# Altium PCB PCB.PcbDoc
Units mm, origin at the board's own origin, x right, y up, seen from the top; angles counter-clockwise.
Board outline 63.5 x 55.5 mm, 4 copper layers (L1(Signal), L2(Power), L3(GND), L4(Signal)), stack 0.603 mm thick; 45 components, 39 nets, 166 pads, 72 vias.
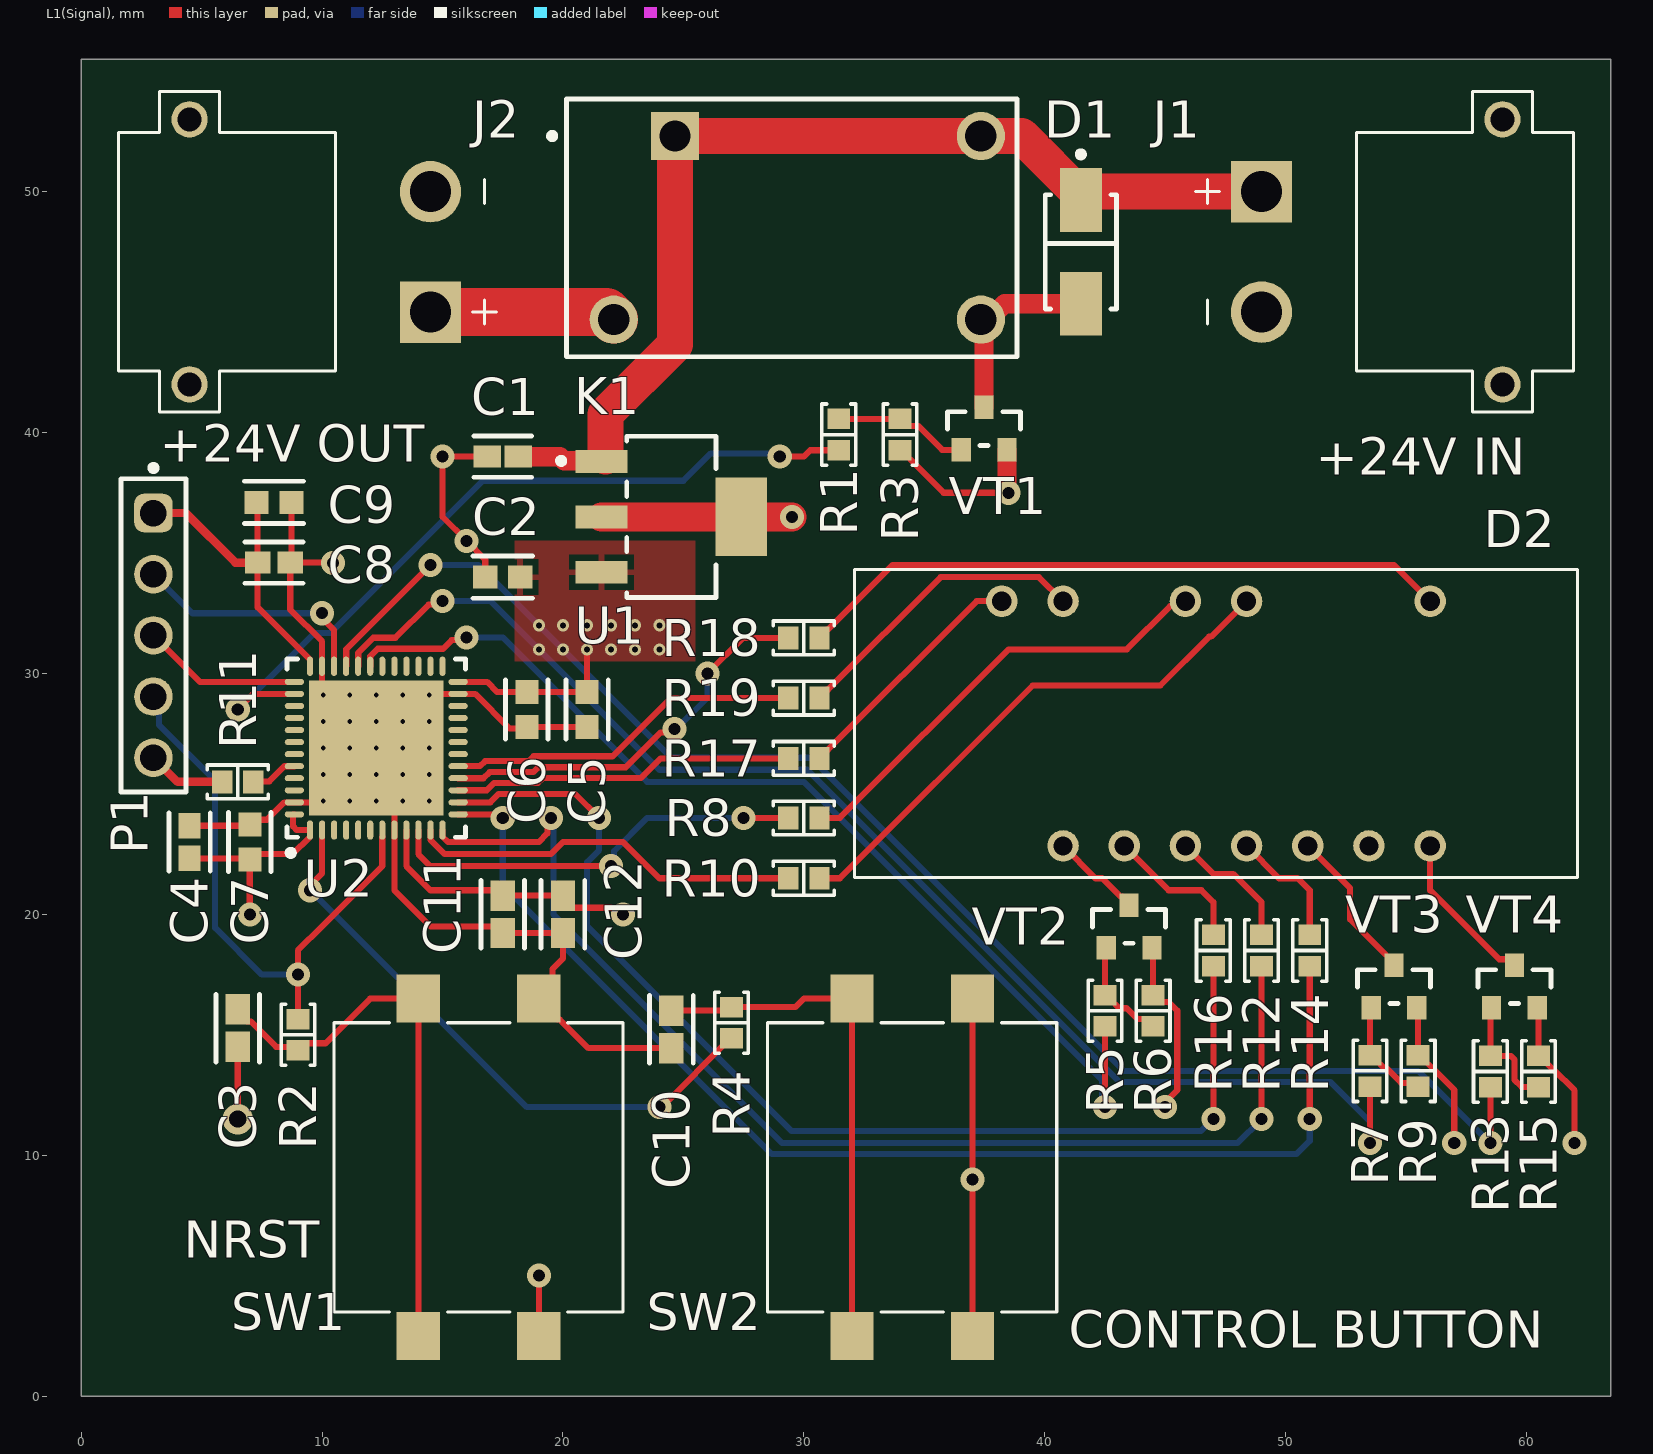
[diagram p0: L1(Signal) view]
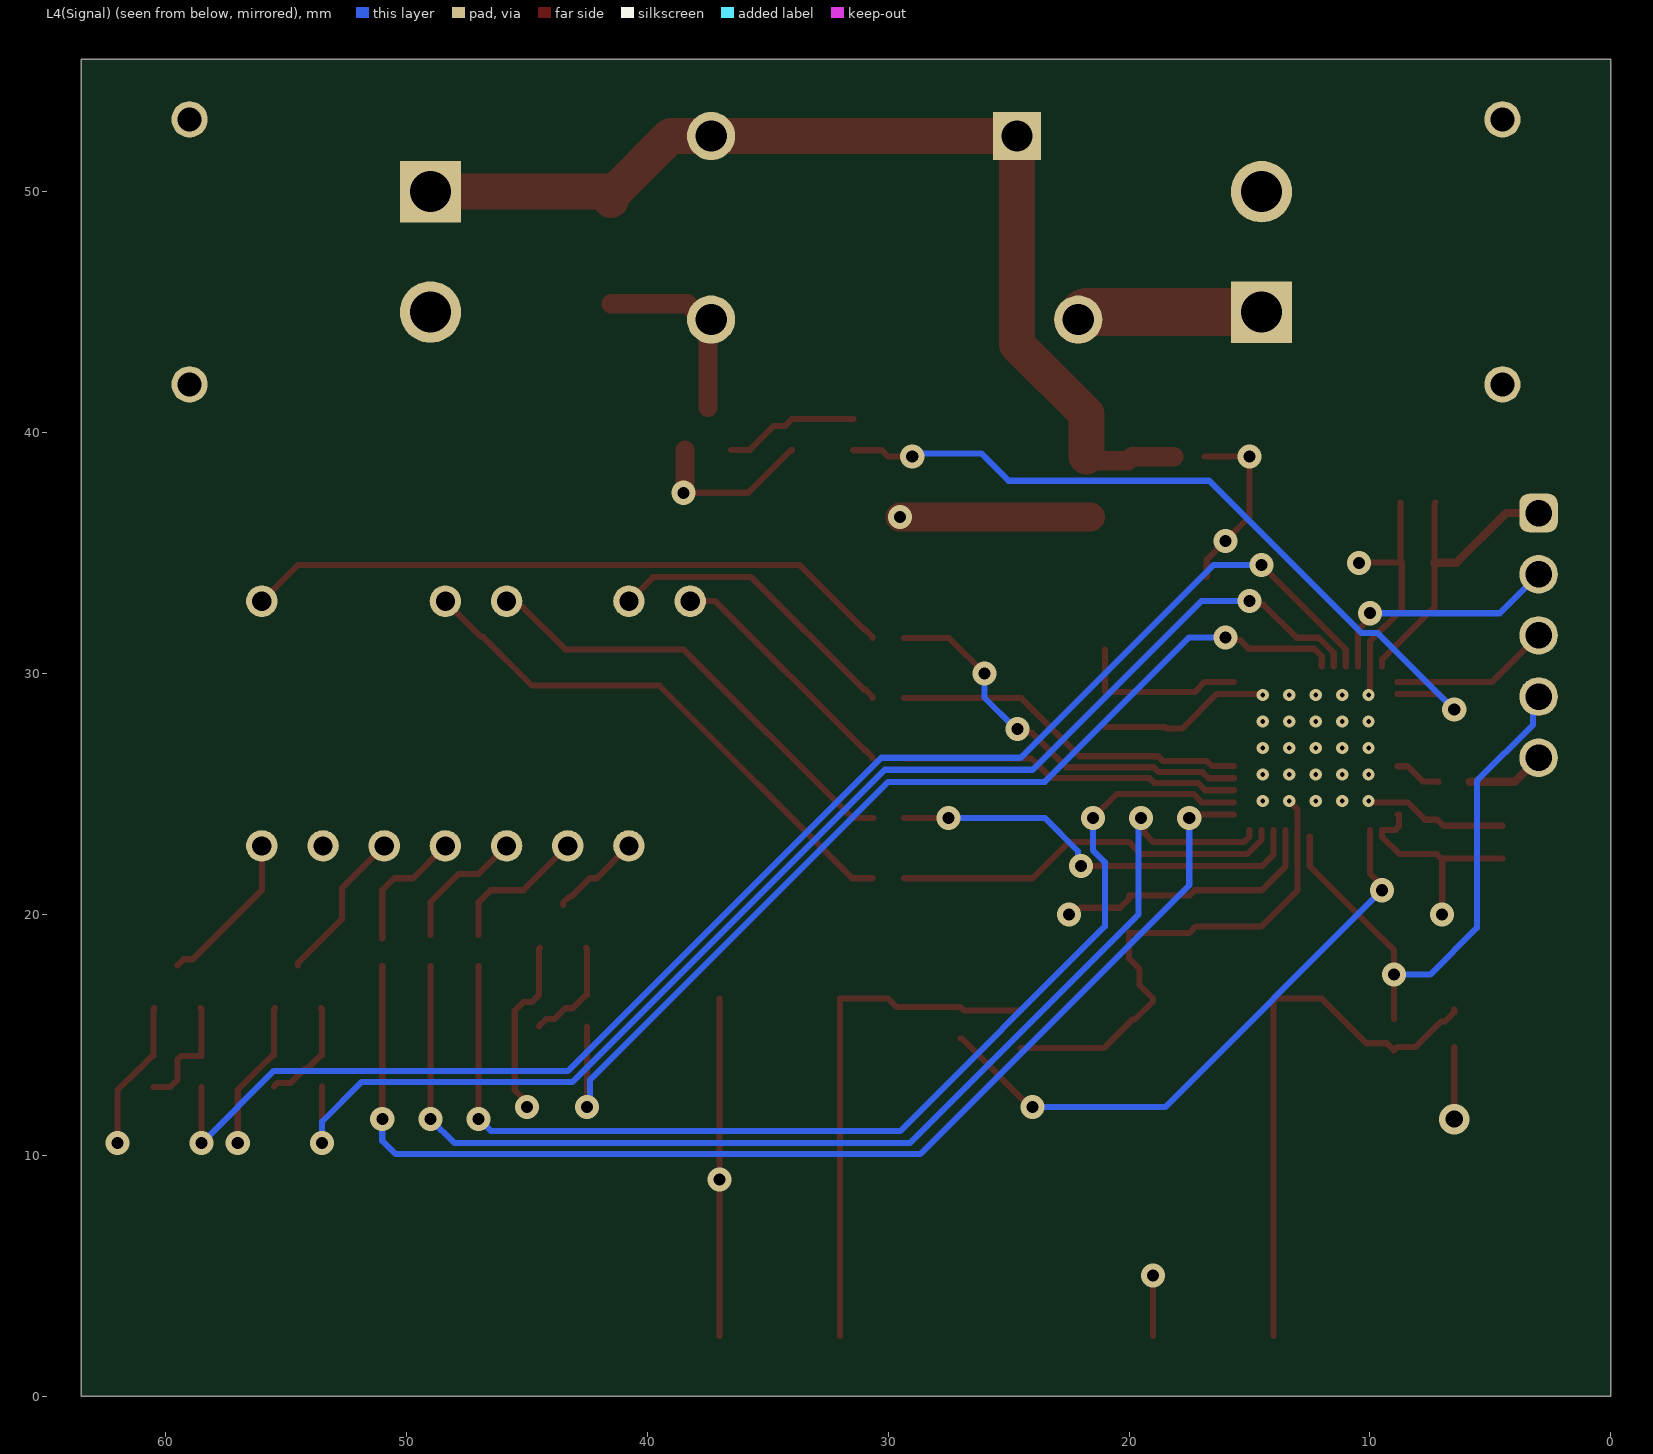
[diagram p1: L4(Signal) view, seen from below]
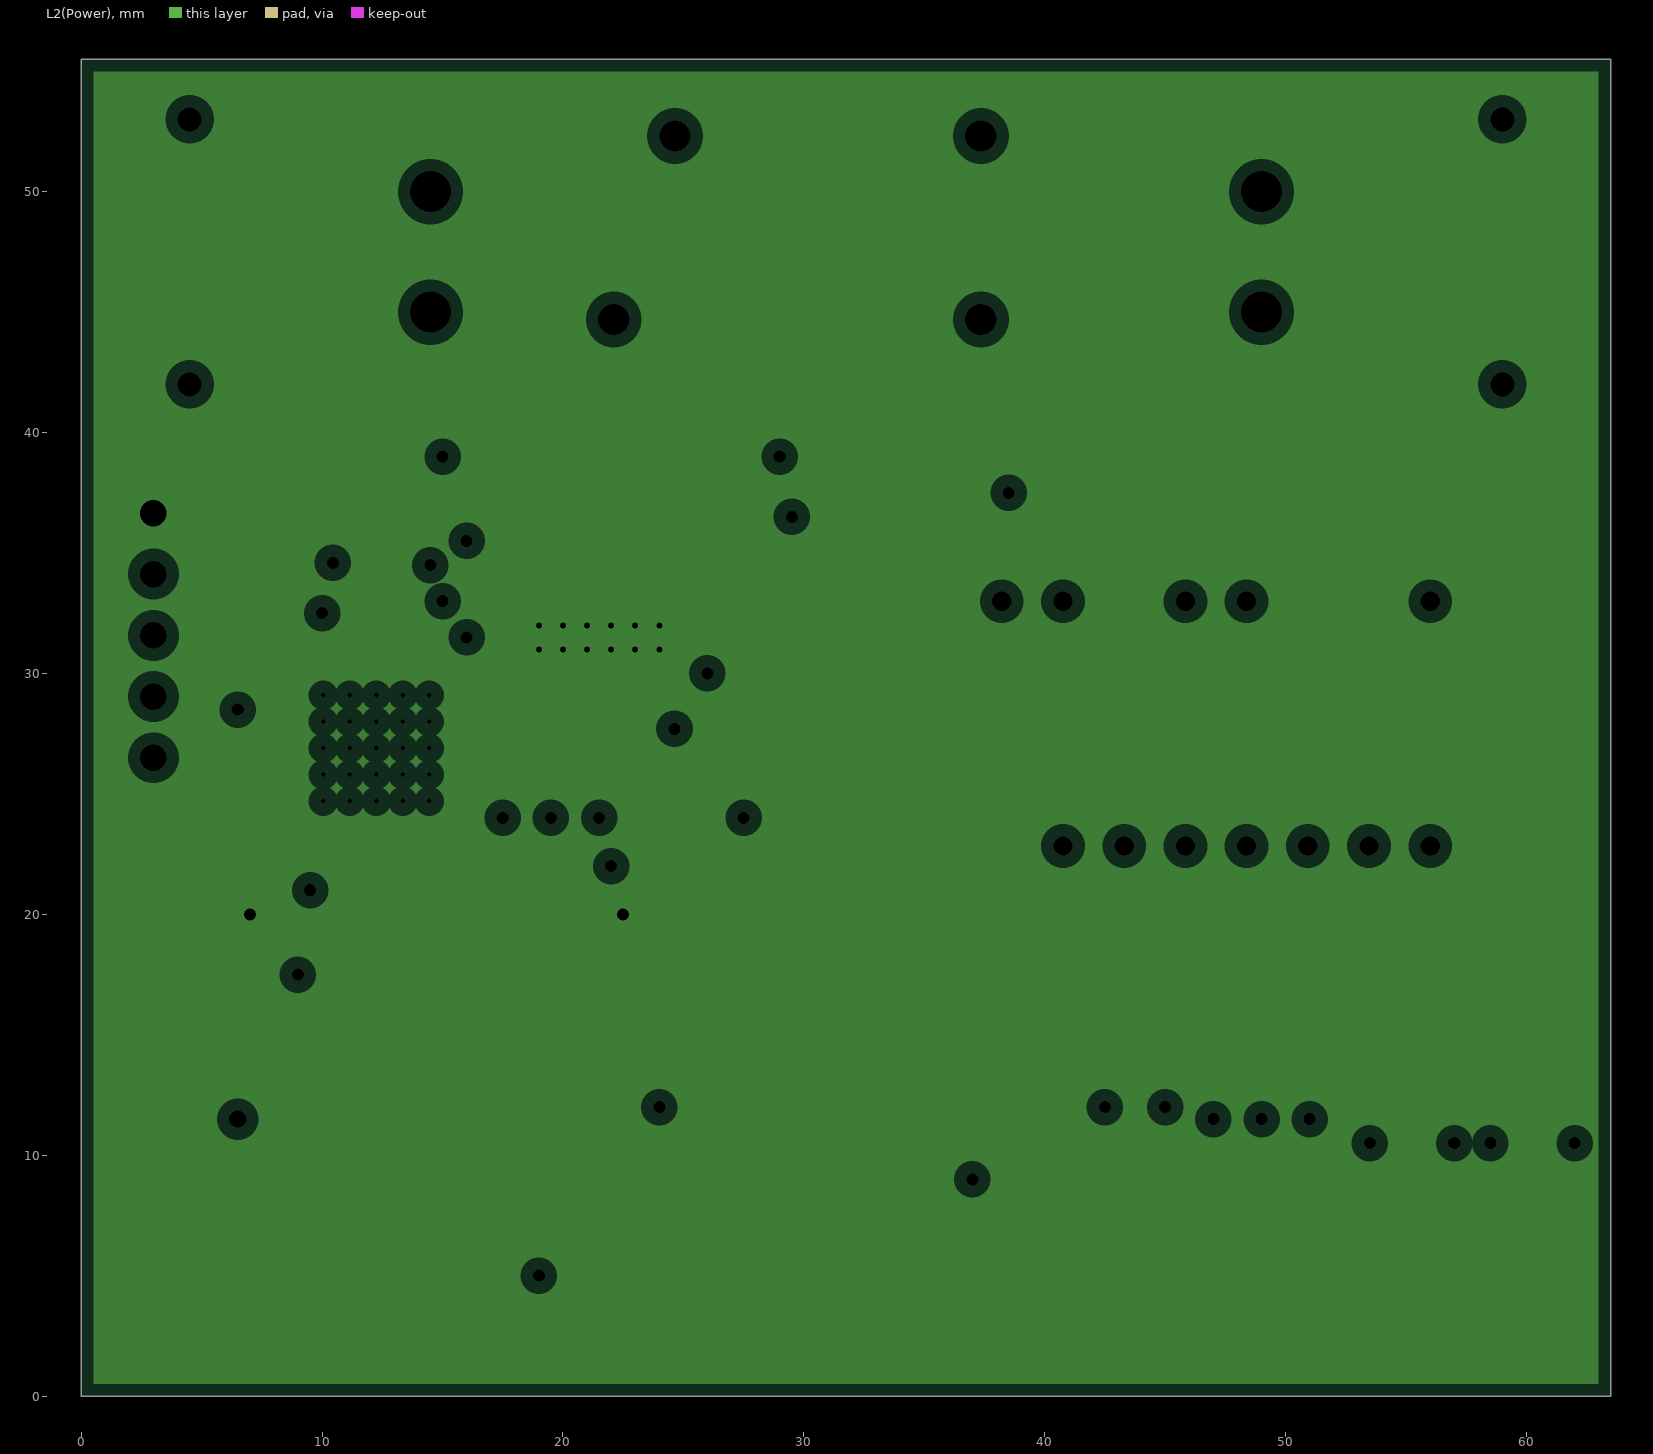
[diagram p2: L2(Power), clearances drawn from the general rule]
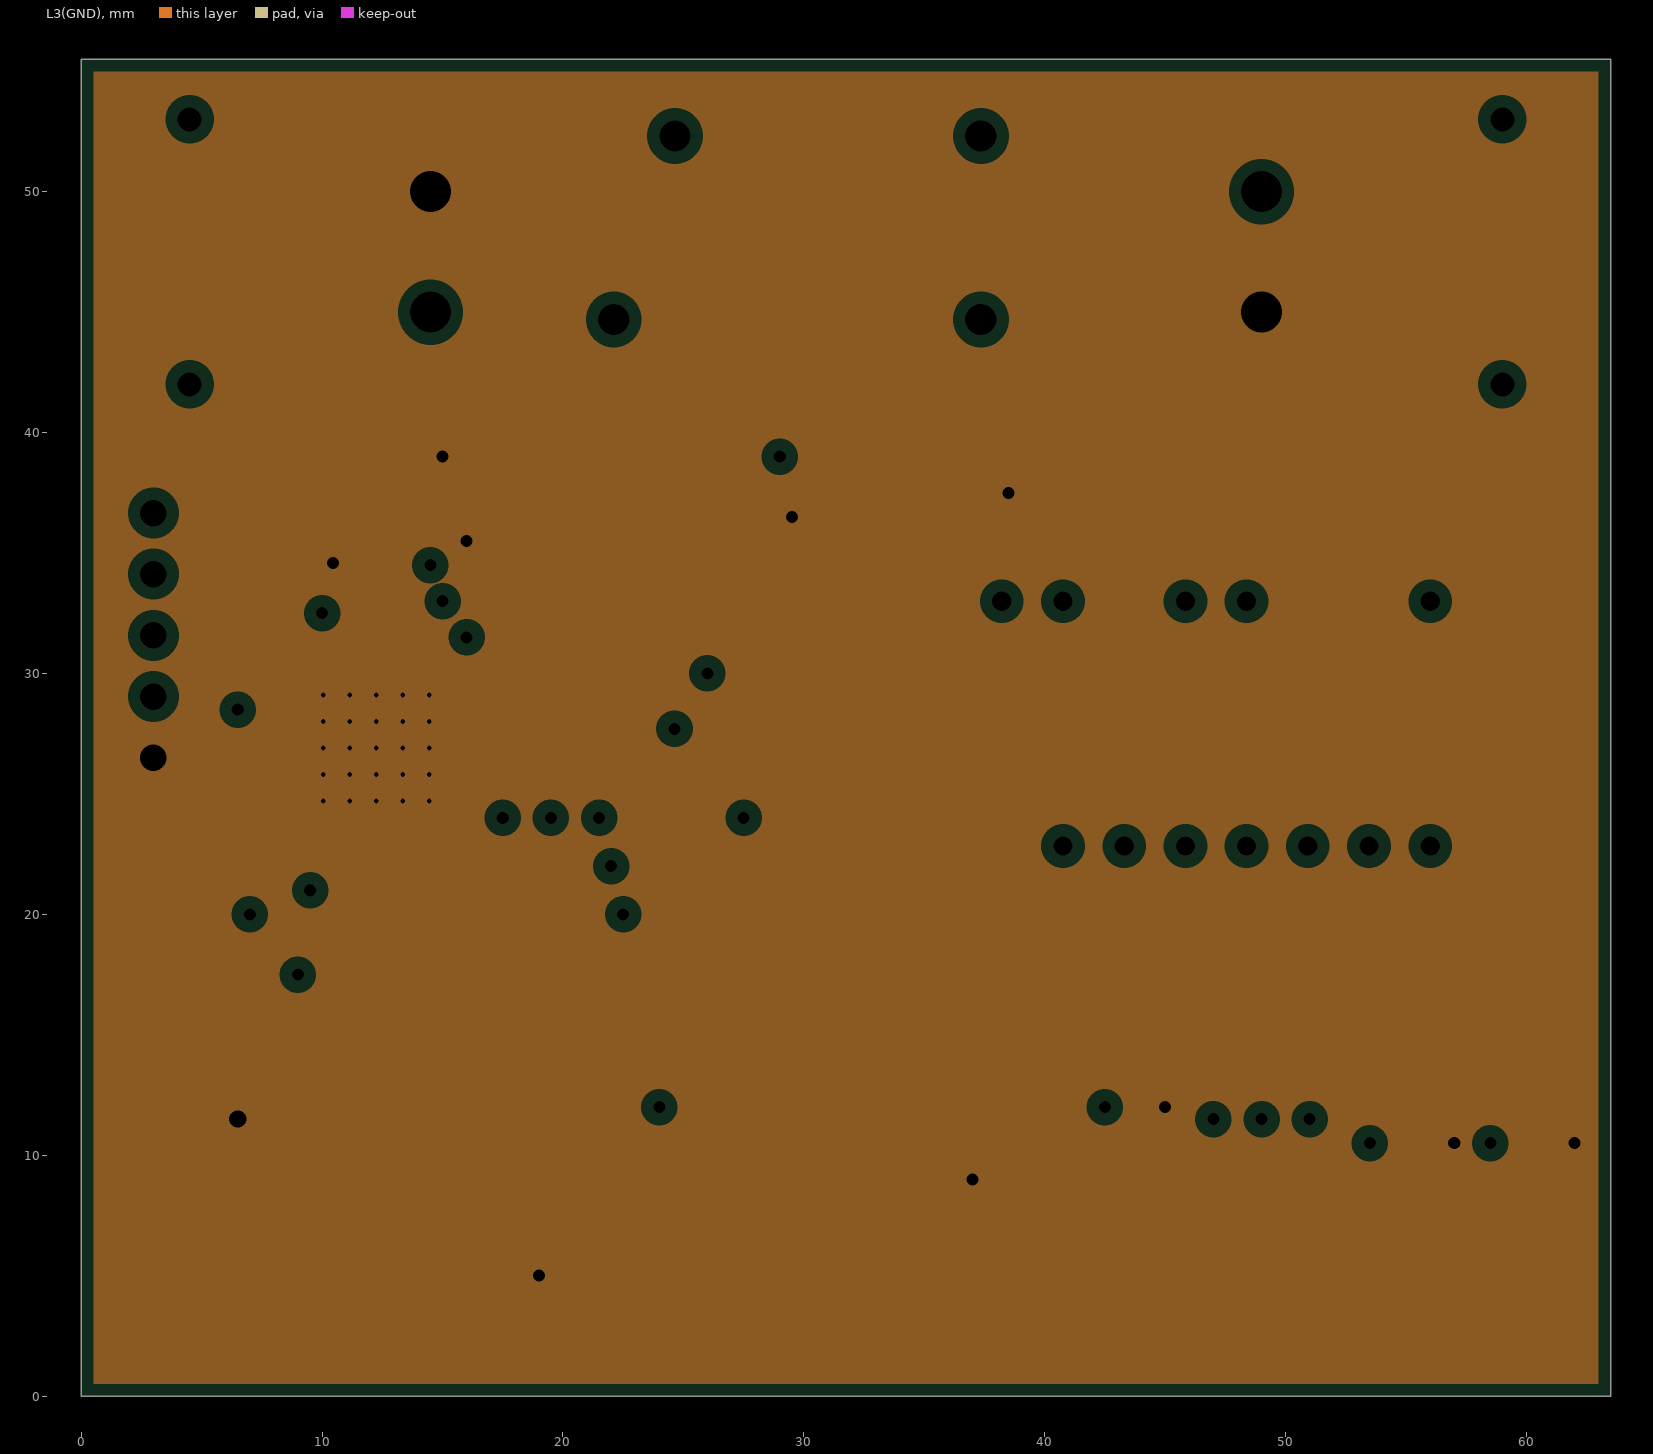
[diagram p3: L3(GND), clearances drawn from the general rule]
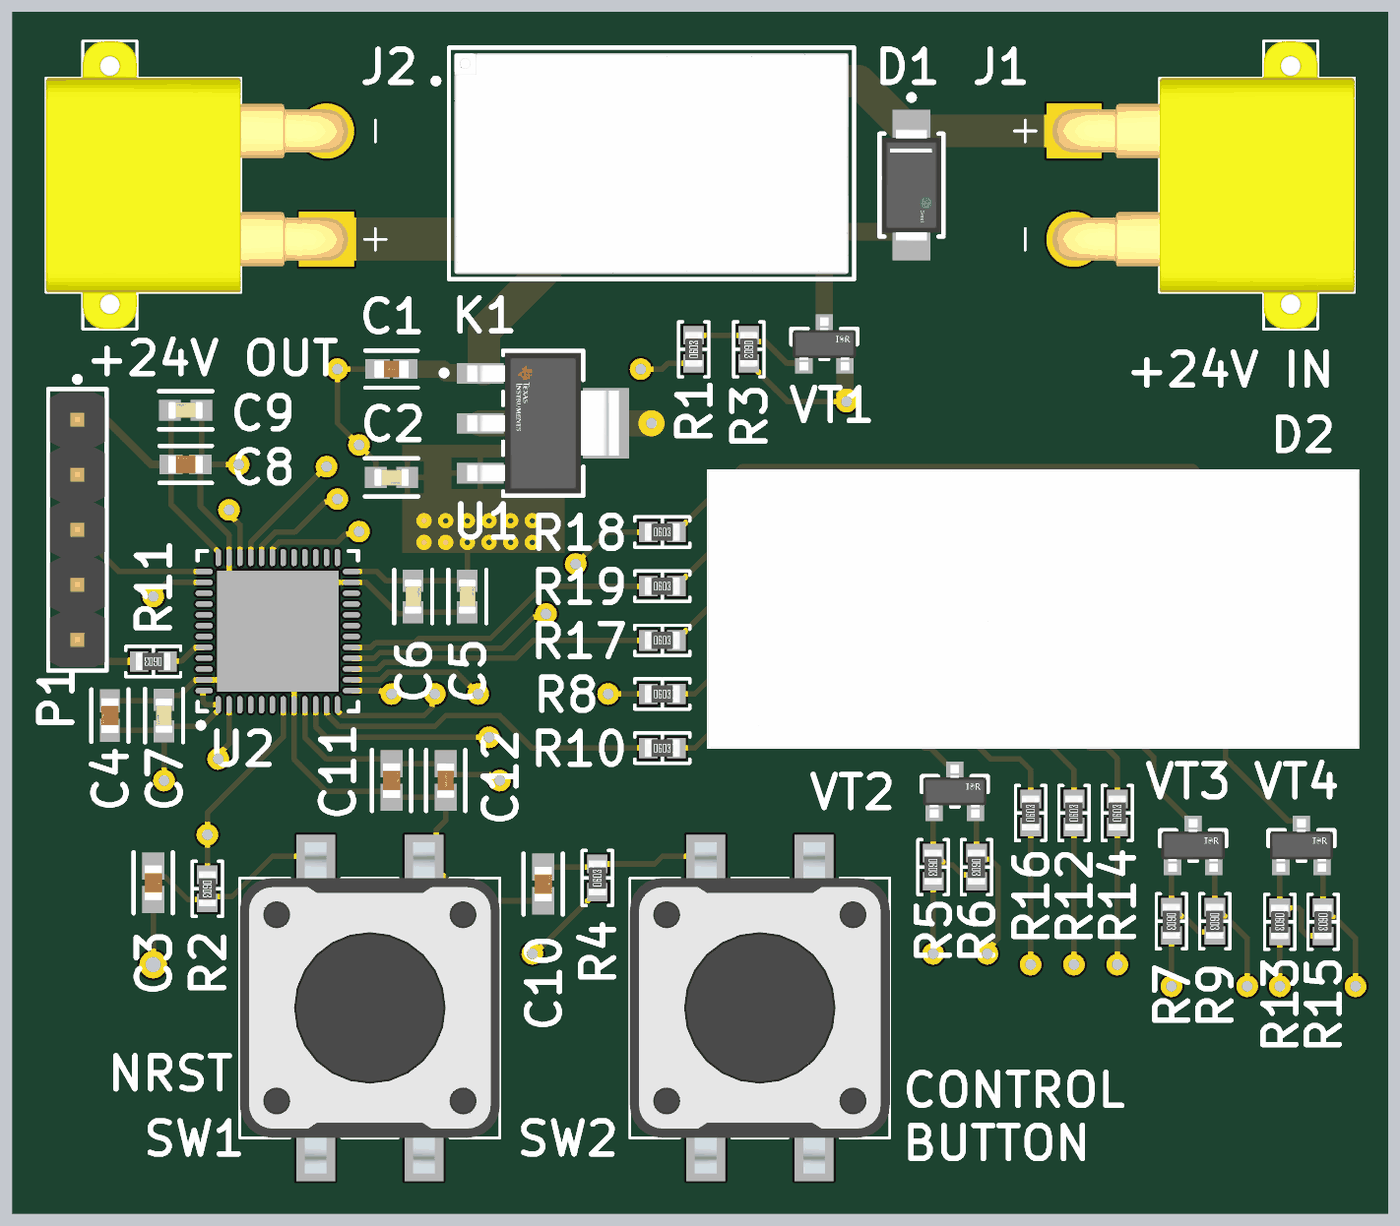
[diagram p4: 3D render of the assembled board from above, using the file's embedded part models]

## Layer stack, top to bottom
Top Solder: solder mask 0.0102, Solder Resist, Dk 3.5
L1(Signal): signal copper 0.0356
Dielectric 2: prepreg 0.0711, PP-006, Dk 4.1
L2(Power): plane copper 0.035, net +3.3V
Dielectric 1: dielectric 0.32, FR-4, Dk 4.8
L3(GND): plane copper 0.035, net GND
Dielectric 3: prepreg 0.0711, PP-006, Dk 4.1
L4(Signal): signal copper 0.0356
Bottom Solder: solder mask 0.0102, Solder Resist, Dk 3.5

## Board outline
0,0 0,55.5 63.5,55.5 63.5,0

## Design rules (kind name [scope] priority, off if disabled: settings)
Clearance "Stitching +3.3V" [IsStitchingVia and InNet('+3.3V') vs (IsVia and (Not IsStitchingVia)) Or IsPad] p1: gap=0.127 ignorepadtopadclearanceinfootprint=FALSE
Clearance [All] p2: gap=0.2 ignorepadtopadclearanceinfootprint=FALSE
MinimumSolderMaskSliver [All] p1: minsoldermaskwidth=0.1
PlaneClearance [All] p1: clearance=0.508
PlaneConnect [All] p1: pad.planeconnectstyle=Relief pad.reliefexpansion=0.508 pad.reliefentries=4 pad.reliefconductorwidth=0.254 pad.reliefairgap=0.254 via.planeconnectstyle=Direct via.reliefexpansion=0.508 via.reliefentries=4 via.reliefconductorwidth=0.254 via.reliefairgap=0.254
PlaneConnect PlaneConnect_GND [InNet('GND')] p2: planeconnectstyle=Direct reliefexpansion=0.508 reliefentries=4 reliefconductorwidth=0.254 reliefairgap=0.254
PolygonConnect [All] p1: thpad.connectstyle=Relief thpad.reliefconductorwidth=0.254 thpad.reliefentries=4 thpad.polygonreliefangle="90 Angle" thpad.airgapwidth=0.254 smdpad.connectstyle=Relief smdpad.reliefconductorwidth=0.254 smdpad.reliefentries=4 smdpad.polygonreliefangle="90 Angle" smdpad.airgapwidth=0.254 via.connectstyle=Direct via.reliefconductorwidth=0.254 via.reliefentries=4 via.polygonreliefangle="90 Angle" via.airgapwidth=0.254
RoutingVias [All] p1: holewidth=0.5 width=1 viastyle="Through Hole" minholewidth=0.2 minwidth=0.3 maxholewidth=0.711 maxwidth=1.27
SilkToSilkClearance [All] p1: silktosilkclearance=0.15
SilkToSolderMaskClearance [IsPad] p1: minsilkscreentomaskgap=0.1 clearancetoexposedcopper=TRUE
SolderMaskExpansion [All] p1: expansion=0.102 istentingtop=FALSE
SupplyNets "Schematic Supply Nets_1" [InNet('GND')] p1: voltage=0.000
SupplyNets "Schematic Supply Nets" [InNet('+3.3V')] p2: voltage=0.000
Width [All] p1: maxlimit=2 minlimit=0.254 preferedwidth=0.35 minimp=50.000000 maximp=50.000000 favimp=50.000000
25 further rules are at their usual default settings.

## Components (designator, comment, footprint, x,y, rotation, side; value= is the part's Value field where it differs from the comment)
C1 "330nF" FP-C1608-080-0_1-IPC_B 17.5,39 r0 top
C2 "0.10 μF" FP-C0603C-CF-IPC_B 17.5,34 r180 top
C3 "1uF" FP-0603-L_1_6_0_1-W_0_8_0-IPC_A 6.5,15.277 r270 top
C4 "4.7uF" FP-0603-L_1_6_0_1-W_0_8_0-IPC_B 4.5,23 r90 top
C5 "0.10 μF" FP-C0603C-CF-IPC_B 21,28.5 r270 top
C6 "0.10 μF" FP-C0603C-CF-IPC_B 18.5,28.5 r270 top
C7 "0.10 μF" FP-C0603C-CF-IPC_B 7,23 r90 top
C8 "4.7uF" FP-0603-L_1_6_0_1-W_0_8_0-IPC_B 8,34.6 r0 top
C9 "0.10 μF" FP-C0603C-CF-IPC_B 8,37.1 r0 top
C10 "1uF" FP-0603-L_1_6_0_1-W_0_8_0-IPC_A 24.5,15.223 r270 top
C11 "1uF" FP-0603-L_1_6_0_1-W_0_8_0-IPC_A 17.5,20 r270 top
C12 "10nF" FP-0603-L_1_6_0_1-W_0_8_0-IPC_A 20,20 r270 top
D1 "SS14" FP-403AE-MFG 41.5,47.5 r90 top
D2 "HDSP-433G" HDSP-433G 47.11,27.92 r0 top
J1 "XT30PW-M" AMASS_XT30PW-M 59,47.5 r270 top
J2 "XT30PW-M" AMASS_XT30PW-M 4.5,47.5 r90 top
K1 "1721538-7 TE Connectivity" FP-1721538-7-MFG 29.5,48.5 r0 top
P1 "" 61300511121 3,31.58 r270 top
R1 "22Ω" "RES 0603_1608" 31.45,39.915 r90 top
R2 "10kΩ" "RES 0603_1608" 9,15 r270 top
R3 "10kΩ" "RES 0603_1608" 33.99,39.915 r270 top
R4 "10kΩ" "RES 0603_1608" 27,15.5 r90 top
R5 "22Ω" "RES 0603_1608" 42.5,16 r270 top
R6 "10kΩ" "RES 0603_1608" 44.5,16 r270 top
R7 "22Ω" "RES 0603_1608" 53.5,13.5 r270 top
R8 "220Ω" "RES 0603_1608" 30,24 r0 top
R9 "10kΩ" "RES 0603_1608" 55.5,13.5 r270 top
R10 "220Ω" "RES 0603_1608" 30,21.5 r0 top
R11 "10kΩ" "RES 0603_1608" 6.5,25.5 r180 top
R12 "220Ω" "RES 0603_1608" 49,18.5 r90 top
R13 "22Ω" "RES 0603_1608" 58.5,13.475 r270 top
R14 "220Ω" "RES 0603_1608" 51,18.5 r90 top
R15 "10kΩ" "RES 0603_1608" 60.5,13.475 r270 top
R16 "220Ω" "RES 0603_1608" 47,18.5 r90 top
R17 "220Ω" "RES 0603_1608" 30,26.475 r0 top
R18 "220Ω" "RES 0603_1608" 30,31.475 r0 top
R19 "220Ω" "RES 0603_1608" 30,28.975 r0 top
SW1 "430162043826" 430162043826 16.5,9.5 r90 top
SW2 "430162043826" 430162043826 34.5,9.5 r90 top
U1 "UA78M33CDCY" FP-DCY0004A-MFG 24.5,36.5 r0 top
U2 "STM32F072CBU6TR" STM-UFQFPN48_L 12.25,26.9 r90 top
VT1 "IRLML2030TRPBF" FP-Micro3-MFG 37.48,40.165 r90 top
VT2 "IRLML2030TRPBF" FP-Micro3-MFG 43.5,19.5 r90 top
VT3 "IRLML2030TRPBF" FP-Micro3-MFG 54.5,17 r90 top
VT4 "IRLML2030TRPBF" FP-Micro3-MFG 59.5,17 r90 top

## Footprints (in the part's own frame and the unit in brackets; to place one, negate y for a bottom-side part, rotate by r counter-clockwise, add the part's x,y. Pads: shape width x height; smd on the part's side, far side on the other; paste and mask are expansions set on the pad)
61300511121 [mm] "Pin Header, pitch 2.54 mm, THT, Vertical, single row, 5p"
  rrect50% 1.6x1.6 hole 1.1: 1(-5.08,0)
  round 1.6 hole 1.1: 2(-2.54,0) 3(0,0) 4(2.54,0) 5(5.08,0)
  silkscreen extent -7.07,-1.35 6.5,1.35, body extent -6.35,-1.27 6.35,1.27, height 8.57
430162043826 [mm] "Tact Switch, SMD, body 12x12mm"
  rect 2x1.8 smd: A1(-7,2.5) A2(7,2.5) B1(-7,-2.5) B2(7,-2.5)
  silkscreen extent -6,-6 6,6, body extent -7.65,-6 7.65,6, height 4.31
AMASS_XT30PW-M [mm]
  round 2.55 hole 1.7: N(2.5,-10)
  rect 2.55x2.55 / inner round 2.55 / far side rect 2.55x2.55 hole 1.7: P(-2.5,-10)
  round 1.508 hole 1: S1(5.5,0) S2(-5.5,0)
  silkscreen extent -6.65,-12.75 6.65,2.95, body extent -6.65,-11 6.65,2.95, height 5
FP-403AE-MFG [mm]
  rect 2.65x1.75 smd paste+0 mask+0: 1(-2.15,0) 2(2.15,0)
  silkscreen extent -2.37,-1.48 4.17,1.48, body extent -3.57,-1.58 3.57,1.58, height 0.25
FP-0603-L_1_6_0_1-W_0_8_0-IPC_A [mm]
  rect 1.258x1.012 smd paste+0 mask+0: 1(-0.777,0) 2(0.777,0)
  silkscreen extent -1.41,-0.91 1.41,0.91, body extent -1.91,-1.01 1.91,1.01, height 0.25
FP-0603-L_1_6_0_1-W_0_8_0-IPC_B [mm]
  rect 1.058x0.912 smd paste+0 mask+0: 1(-0.677,0) 2(0.677,0)
  silkscreen extent -1.21,-0.86 1.21,0.86, body extent -1.46,-0.71 1.46,0.71, height 0.25
FP-1721538-7-MFG [mm]
  rect 2x2 hole 1.3 paste-2539.97 mask+0: 1(-4.85,3.81)
  round 2 hole 1.3 paste-2539.97 mask+0: 2(7.85,3.81) 3(-7.39,-3.81) 4(7.85,-3.81)
  silkscreen extent -10.07,-5.35 9.35,5.35, body extent -9.45,-5.45 9.45,5.45, height 0.25
FP-C0603C-CF-IPC_B [mm]
  rect 1.007x0.958 smd paste+0 mask+0: 1(-0.726,0) 2(0.726,0)
  silkscreen extent -1.23,-0.88 1.23,0.88, body extent -1.48,-0.73 1.48,0.73, height 0.25
FP-C1608-080-0_1-IPC_B [mm]
  rect 1.131x0.912 smd paste+0 mask+0: 1(-0.641,0) 2(0.641,0)
  silkscreen extent -1.21,-0.86 1.21,0.86, body extent -1.46,-0.71 1.46,0.71, height 0.25
FP-DCY0004A-MFG [mm]
  rect 2.15x0.95 smd paste+0 mask+0: 1(-2.9,2.3) 2(-2.9,0) 3(-2.9,-2.3)
  rect 2.15x3.25 smd paste+0 mask+0: 4(2.9,0)
  silkscreen extent -4.7,-3.35 1.85,3.35, body extent -4.08,-3.45 4.08,3.45, height 0.25
FP-Micro3-MFG [mm]
  rect 0.972x0.802 smd paste+0 mask+0: 1(-0.885,0.95) 2(-0.885,-0.95) 3(0.885,0)
  silkscreen extent -0.7,-1.52 0.7,1.52, body extent -1.47,-1.87 1.47,1.87, height 0.25
HDSP-433G [mm]
  round 1.308 hole 0.8: A(-1.27,5.08) B(1.27,5.08) C(-1.27,-5.08) D(1.27,-5.08) D1(-6.35,-5.08) D2(3.81,-5.08) D3(8.89,-5.08) DP(6.35,-5.08) E(-3.81,-5.08) F(-8.89,5.08) G(8.89,5.08) L(-6.35,5.08)
  silkscreen extent -15,-6.4 15,6.4, body extent -15.01,-6.4 15.01,6.4, height 7.31
"RES 0603_1608" [mm] "Chip Resistor, 2-Leads, Body 1.60x0.80mm, IPC Medium Density"
  rect 0.85x0.95 smd: 1(-0.65,0) 2(0.65,0)
  silkscreen extent -1.27,-0.7 1.27,0.7, body extent -0.8,-0.4 0.8,0.4, height 0.45
STM-UFQFPN48_L [mm] "QFN, 48-Leads, Body 7.1x7.1mm, Pitch 0.5mm, Thermal Pad 5.6x5.6mm, IPC High Density"
  oval 0.8x0.25 smd: 1(-3.4,2.75) 2(-3.4,2.25) 3(-3.4,1.75) 4(-3.4,1.25) 5(-3.4,0.75) 6(-3.4,0.25) 7(-3.4,-0.25) 8(-3.4,-0.75) 9(-3.4,-1.25) 10(-3.4,-1.75) 11(-3.4,-2.25) 12(-3.4,-2.75) 25(3.4,-2.75) 26(3.4,-2.25) 27(3.4,-1.75) 28(3.4,-1.25) 29(3.4,-0.75) 30(3.4,-0.25) 31(3.4,0.25) 32(3.4,0.75) 33(3.4,1.25) 34(3.4,1.75) 35(3.4,2.25) 36(3.4,2.75)
  oval 0.25x0.8 smd: 13(-2.75,-3.4) 14(-2.25,-3.4) 15(-1.75,-3.4) 16(-1.25,-3.4) 17(-0.75,-3.4) 18(-0.25,-3.4) 19(0.25,-3.4) 20(0.75,-3.4) 21(1.25,-3.4) 22(1.75,-3.4) 23(2.25,-3.4) 24(2.75,-3.4) 37(2.75,3.4) 38(2.25,3.4) 39(1.75,3.4) 40(1.25,3.4) 41(0.75,3.4) 42(0.25,3.4) 43(-0.25,3.4) 44(-0.75,3.4) 45(-1.25,3.4) 46(-1.75,3.4) 47(-2.25,3.4) 48(-2.75,3.4)
  rect 5.6x5.6 smd: 49(0,0)
  silkscreen extent -4.47,-3.7 3.7,3.7, body extent -3.55,-3.55 3.55,3.55, height 0.6

## Part data
C1: library part CMP-08246-004873-1, "Multilayer Ceramic Capacitors 330nF ±20% 35V X5R SMD 0603", Case Code (Imperial)=0603, Case Code (Metric)=1608, Dielectric Material=Ceramic, Max Operating Temperature=85°C, Min Operating Temperature=-55°C, Package Quantity=4000, Tolerance=20%, Voltage Rating=35V, Capacitance=330nF, Case/Package=0603, Lead Free="Lead Free", Length=0.063inch, Mount="Surface Mount", Packaging="Tape and Reel", RoHS Compliant=Yes, Series=C, Thickness=0.035inch, Voltage Rating (DC)=35V, Width=0.031inch
C2 C5 C6 C7 C9: library part CMP-2006-03055-2, "CAP CER 0.1UF 50V X7R 0603", Manufacturer=KEMET, Manufacturer Part Number=C0603C104J5RACAUTO, Package=C0603C-CF, Temperature="-55°C to +125°C", Temperature Characteristic=X7R, Temperature Coefficient=30ppm/°C, Temperature Range High=+125°C, Temperature Range Low=-55°C, Tolerance=0.05, Voltage Rating="50 V", Automotive=Yes, Automotive Grade="Grade 1", Capacitance="0.10 μF", Category=Cap, ComponentLink2Description=Datasheet, ComponentLink2URL=https://api.kemet.com/component-edge/download/datasheet/C0603C100J5GACAUTO.pdf, Device Class L1="Passive Components", Device Class L2=Capacitors, Device Class L3="Ceramic Capacitors", Digikey Description="CAP CER 0.1UF 50V X7R 0603", Height=0.87mm, Lead Free=Yes, Material=Ceramic, Mouser Description="Multilayer Ceramic Capacitors MLCC - SMD/SMT 0.1uF 50volts 5% X7R AUTO", Octopart=https://octopart.com/c0603c104j5racauto-kemet-18804944, RoHS=TRUE
C3 C10 C11: library part CMP-14477-003273-2, "None", Case/Package=0603, Max Operating Temperature=85°C, Min Operating Temperature=-55°C, Ratings=AEC-Q200, Tolerance=20%, Voltage Rating=35V, Capacitance=1uF, Mount="Surface Mount", Packaging="Tape and Reel", RoHS Compliant=Yes
C4 C8: library part CMP-14477-000167-2, "None", Case Code (Imperial)=0603, Case Code (Metric)=1608, Dielectric=X5R, Max Operating Temperature=85°C, Min Operating Temperature=-55°C, Package Quantity=4000, Resistor Type=Ceramic, Tolerance=20%, Voltage=6.3V, Capacitance=4.7uF, Case/Package=0603, Construction=Flat, Depth=0.8mm, Halogen Free="Halogen Free", Height=0.45mm, Lead Free="Lead Free", Length=1.6mm, Mount="Surface Mount", Packaging="Tape and Reel", Radiation Hardening=No, RoHS Compliant=Yes, Series=M, Termination=SMD/SMT, Thickness=0.02inch, Voltage Rating=6.3V, Voltage Rating (DC)=6.3V, Width=0.031inch
C12: library part CMP-14477-001835-2, "None", Case Code (Imperial)=0603, Case Code (Metric)=1608, Max Operating Temperature=125°C, Min Operating Temperature=-55°C, Package Quantity=1, Resistor Type=Ceramic, Tolerance=10%, Voltage Rating=16V, Capacitance=10nF, Case/Package=0603, Construction=Flat, Depth=0.8mm, Halogen Free="Halogen Free", Height=0.8mm, Lead Free="Lead Free", Length=1.6mm, Mount="Surface Mount", Packaging="Tape and Reel", Radiation Hardening=No, RoHS Compliant=Yes, Series=CFCAP™, Termination=SMD/SMT, Thickness=0.035inch, Voltage Rating (DC)=16V, Weight=7.1E-05oz, Width=0.031inch
D1: library part CMP-2000-04943-2, "DIODE SCHOTTKY 40V 1A SMA", Forward Current=1A, Manufacturer="ON Semiconductor", Max Junction Temp=+125°C, Max Repetitive Reverse Voltage=40V, Max Surge Forward Current=40A, Package=403AE, Peak Reverse Current=0.2mA, Temperature="-65°C to +125°C", Temperature Range Low=-65°C, Automotive=No, Category=Diode, ComponentLink2Description=Datasheet, ComponentLink2URL=https://www.onsemi.com/pub/Collateral/SS19-D.PDF, Device Class L1="Discrete Semiconductors", Device Class L2=Diodes, Device Class L3="Schottky Diodes", Digikey Description="DIODE SCHOTTKY 40V 1A SMA", Height=2.5mm, Lead Free=Yes, Manufacturer Part Number=SS14, Mouser Description="Schottky Diodes & Rectifiers SMA 40V 1.0A", Octopart=https://octopart.com/ss14-on+semiconductor-29205033, RoHS=TRUE, Standoff Height=0.05mm, Temperature Range High=+125°C
D2: "Display Modules - LED Character and Numeric Green 7-Segment 3 Character Common Cathode 2.25V 20mA 0.504 H x 1.182 W x 0.276 D _12.80mm x 30.02mm x 7.00mm_ 15-DIP _0.400, 10.16mm_, 12 Leads", Package="DIP-15 Broadcom", Digi-Key_Part_Number=516-3125-ND, Digi-Key_Purchase_URL=https://www.digikey.com/product-detail/en/broadcom-limited/HDSP-433G/516-3125-ND/2219091?utm_source=snapeda&utm_medium=aggregator&utm_campaign=symbol, MF="Broadcom Limited", MP=HDSP-433G, SnapEDA_Link=https://www.snapeda.com/parts/HDSP-433G/Broadcom%20Limited/view-part/1760683/?ref=snap
J1 J2: "Socket; DC supply; XT30; male; PIN: 2; on PCBs; THT; Colour: yellow", Manufacturer=AMASS, Package=None, Manufacturer Part Number=XT30PW-M
K1: library part CMP-03395-000288-1, "RELAY GEN PURPOSE SPST10A 24V", Coil Current=18.75mA, Coil Resistance=1.28kR, Coil Voltage (DC)=24V, Contact Current Rating=10A, Max Operating Temperature=85°C, Voltage Rating (AC)=277V, Contact Material=Tin, Depth=10.2mm, ELV=Compliant, Height=14.7mm, Lead Free="Lead Free", Length=18.2mm, Mount="Through Hole", Packaging=Tray, RoHS Compliant=Yes, Termination=PCB, Throw Configuration=SPST, Weight=9g, Width=10.2mm
P1: library part CMP-1502-01068-4, "THT Vertical Pin Header WR-PHD, Pitch 2.54 mm, Single Row, 5 pins", Color=Black, Contact Resistance=20mΩ, Current Rating=3A, Max Operating Temperature=105°C, Min Operating Temperature=-40°C, Operating Supply Voltage=250V, Connector Type="Male Pin", Contact Material=Gold, Contact Mating Length=5.9944mm, Contact Plating=Gold, Gender=Male, Height=8.89mm, Lead Free="Lead Free", Lead Pitch=2.54mm, Mount="Through Hole", Number of Contacts=5, Number of Pins=5, Number of Positions=5, Number of Rows=1, Orientation=Vertical, Packaging=Bulk, Pitch=2.54mm, RoHS=Compliant, Termination=Solder, Voltage Rating=250V
R1 R5 R7 R13: library part Resistor, "Fixed Resistor, Metal Glaze/Thick Film, 0.1W, 22ohm, 75V, 5% +/-Tol, Surface Mount, 0603", Case Code (Imperial)=0603, Manufacturer=Vishay, Manufacturer Part Number=CRCW060322R0JNTA, Max Operating Temperature=155°C, Max Power Dissipation=100mW, Min Operating Temperature=-55°C, Ratings=AEC-Q200, Supplier Part Number=541-CRCW060322R0JNTACT-ND, Temperature Coefficient=200ppm/°C, Tolerance=5%, Voltage Rating=75V, Case/Package=0603, Category="Chip SMD Resistors", ComponentLink1Description=https://datasheet.octopart.com:443/CRCW060322R0JNTA-Vishay-datasheet-175863636.pdf?src-supplier=IHS, ComponentLink1URL=https://datasheet.octopart.com:443/CRCW060322R0JNTA-Vishay-datasheet-175863636.pdf?src-supplier=IHS, ComponentLink2Description=https://datasheet.octopart.com:443/CRCW060322R0JNTA-Vishay-datasheet-182027442.pdf?src-supplier=IHS, ComponentLink2URL=https://datasheet.octopart.com:443/CRCW060322R0JNTA-Vishay-datasheet-182027442.pdf?src-supplier=IHS, ComponentLink3Description=https://datasheet.octopart.com/D-CRCW-Lead-%28Pb%29-Bearing-Thick-Film%2C-Rectangular-Chip-Resistors-Vishay-datasheet-family-72.pdf, ComponentLink3URL=https://datasheet.octopart.com/D-CRCW-Lead-%28Pb%29-Bearing-Thick-Film%2C-Rectangular-Chip-Resistors-Vishay-datasheet-family-72.pdf, ComponentLink4Description=https://datasheet.octopart.com/CRCW060322R0JNTA-Vishay-datasheet-13242068.pdf, ComponentLink4URL=https://datasheet.octopart.com/CRCW060322R0JNTA-Vishay-datasheet-13242068.pdf, ComponentLink5Description=https://datasheet.octopart.com/CRCW060322R0JNTA-Vishay-datasheet-13195083.pdf, ComponentLink5URL=https://datasheet.octopart.com/CRCW060322R0JNTA-Vishay-datasheet-13195083.pdf, ComponentLink6Description=https://datasheet.octopart.com/CRCW060322R0JNTA-Vishay-datasheet-13034211.pdf, ComponentLink6URL=https://datasheet.octopart.com/CRCW060322R0JNTA-Vishay-datasheet-13034211.pdf, ComponentLink7Description=https://datasheet.octopart.com/CRCW060322R0JNTA-Vishay-datasheet-12600034.pdf, ComponentLink7URL=https://datasheet.octopart.com/CRCW060322R0JNTA-Vishay-datasheet-12600034.pdf, ComponentLink8Description=https://datasheet.octopart.com/CRCW060322R0JNTA-Vishay-datasheet-12532161.pdf, ComponentLink8URL=https://datasheet.octopart.com/CRCW060322R0JNTA-Vishay-datasheet-12532161.pdf, ComponentLink9Description=https://datasheet.octopart.com/CRCW060322R0JNTA-Vishay-datasheet-12517896.pdf, ComponentLink9URL=https://datasheet.octopart.com/CRCW060322R0JNTA-Vishay-datasheet-12517896.pdf, ComponentLink10Description=https://datasheet.octopart.com/CRCW060322R0JNTA-Vishay-datasheet-12509762.pdf, ComponentLink10URL=https://datasheet.octopart.com/CRCW060322R0JNTA-Vishay-datasheet-12509762.pdf, ComponentLink11Description=https://datasheet.octopart.com/CRCW060322R0JNTA-Vishay-datasheet-10322335.pdf, ComponentLink11URL=https://datasheet.octopart.com/CRCW060322R0JNTA-Vishay-datasheet-10322335.pdf, ComponentLink12Description=https://datasheet.octopart.com/CRCW060322R0JNTA-Vishay-datasheet-8788789.pdf, ComponentLink12URL=https://datasheet.octopart.com/CRCW060322R0JNTA-Vishay-datasheet-8788789.pdf, ComponentLink13Description=https://datasheet.octopart.com/CRCW060322R0JNTA-Vishay-datasheet-8361388.pdf, ComponentLink13URL=https://datasheet.octopart.com/CRCW060322R0JNTA-Vishay-datasheet-8361388.pdf, ComponentLink14Description=https://datasheet.octopart.com/CRCW060322R0JNTA-Vishay-datasheet-5306405.pdf, ComponentLink14URL=https://datasheet.octopart.com/CRCW060322R0JNTA-Vishay-datasheet-5306405.pdf, ComponentLink15Description=https://datasheet.octopart.com/CRCW060322R0JNTA-Vishay-datasheet-546287.pdf, ComponentLink15URL=https://datasheet.octopart.com/CRCW060322R0JNTA-Vishay-datasheet-546287.pdf, ComponentLink16Description=https://datasheet.octopart.com:443/CRCW060322R0JNTA-Vishay-datasheet-11539924.pdf?src-supplier=Arrow+Electronics, ComponentLink16URL=https://datasheet.octopart.com:443/CRCW060322R0JNTA-Vishay-datasheet-11539924.pdf?src-supplier=Arrow+Electronics, ComponentLink17Description=https://datasheet.octopart.com:443/CRCW060322R0JNTA-Vishay-datasheet-1945.pdf?src-supplier=RS+(Formerly+Allied+Electronics), ComponentLink17URL=https://datasheet.octopart.com:443/CRCW060322R0JNTA-Vishay-datasheet-1945.pdf?src-supplier=RS+(Formerly+Allied+Electronics), ComponentLink18Description=http://sigma.octopart.com:80/rohs_statement/Vishay-company-15.pdf?src-supplier=Compliance+Statements, ComponentLink18URL=http://sigma.octopart.com:80/rohs_statement/Vishay-company-15.pdf?src-supplier=Compliance+Statements, Composition="Thick Film", Contact Plating="Lead, Tin", Country of Origin=Israel, Depth=850µm, Export Control Classification Number (ECCN) Code=EAR99, Features="Automotive AEC-Q200", Harmonized Tariff Schedule (HTS) Code=8533.21.00.30, Height=450µm, Introduction Date=2005-09-28, Lead Free="Contains Lead", Length=1.55mm, Lifecycle Status=Production, Military Standard=Not, Mounting Technology="Surface Mount", Number of Terminals=2, Number of Terminations=2, Packaging="Tape & Reel (TR)", Power Dissipation=100mW, Power Rating=100mW, Pricing="1=0,14, 10=0,069, 25=0,0536, 50=0,0448, 100=0,038, 250=0,03108, 500=0,02712, 1000=0,024 (USD)", Radiation Hardening=No, REACH SVHC=No, RoHS=Non-Compliant, Stock=3479, Supplier=DigiKey, Supplier 1=DigiKey, Supplier Part Number 1=541-CRCW060322R0JNTACT-ND, Termination=SMD/SMT, Voltage Rating (DC)=75V, Weight=2.012816mg, Width=850µm, Working Voltage=75V
R2 R3 R4 R6 R9 R11 R15: library part Resistor, "Res Thick Film 0603 10K Ohm 5% 0.1W(1/10W) ±200ppm/C Pad SMD Automotive T/R", Case Code (Imperial)=0603, Manufacturer=Vishay, Manufacturer Part Number=CRCW060310K0JNTA, Max Operating Temperature=155°C, Max Power Dissipation=100mW, Min Operating Temperature=-55°C, Ratings=AEC-Q200, Supplier Part Number=85AJ1017, Temperature Coefficient=200ppm/°C, Tolerance=5%, Voltage Rating=75V, Case/Package=0603, Category="Chip SMD Resistors", ComponentLink1Description=https://datasheet.octopart.com:443/CRCW060310K0JNTA-Vishay-datasheet-175863636.pdf?src-supplier=IHS, ComponentLink1URL=https://datasheet.octopart.com:443/CRCW060310K0JNTA-Vishay-datasheet-175863636.pdf?src-supplier=IHS, ComponentLink2Description=https://datasheet.octopart.com:443/CRCW060310K0JNTA-Vishay-datasheet-182027442.pdf?src-supplier=IHS, ComponentLink2URL=https://datasheet.octopart.com:443/CRCW060310K0JNTA-Vishay-datasheet-182027442.pdf?src-supplier=IHS, ComponentLink3Description=https://datasheet.octopart.com/CRCW060310K0JNTA-Vishay-datasheet-13242068.pdf, ComponentLink3URL=https://datasheet.octopart.com/CRCW060310K0JNTA-Vishay-datasheet-13242068.pdf, ComponentLink4Description=https://datasheet.octopart.com/CRCW060310K0JNTA-Vishay-datasheet-13195083.pdf, ComponentLink4URL=https://datasheet.octopart.com/CRCW060310K0JNTA-Vishay-datasheet-13195083.pdf, ComponentLink5Description=https://datasheet.octopart.com/CRCW060310K0JNTA-Vishay-datasheet-13034211.pdf, ComponentLink5URL=https://datasheet.octopart.com/CRCW060310K0JNTA-Vishay-datasheet-13034211.pdf, ComponentLink6Description=https://datasheet.octopart.com/CRCW060310K0JNTA-Vishay-datasheet-12600034.pdf, ComponentLink6URL=https://datasheet.octopart.com/CRCW060310K0JNTA-Vishay-datasheet-12600034.pdf, ComponentLink7Description=https://datasheet.octopart.com/CRCW060310K0JNTA-Vishay-datasheet-12532161.pdf, ComponentLink7URL=https://datasheet.octopart.com/CRCW060310K0JNTA-Vishay-datasheet-12532161.pdf, ComponentLink8Description=https://datasheet.octopart.com/CRCW060310K0JNTA-Vishay-datasheet-12517896.pdf, ComponentLink8URL=https://datasheet.octopart.com/CRCW060310K0JNTA-Vishay-datasheet-12517896.pdf, ComponentLink9Description=https://datasheet.octopart.com/CRCW060310K0JNTA-Vishay-datasheet-12509762.pdf, ComponentLink9URL=https://datasheet.octopart.com/CRCW060310K0JNTA-Vishay-datasheet-12509762.pdf, ComponentLink10Description=https://datasheet.octopart.com/CRCW060310K0JNTA-Vishay-datasheet-10322335.pdf, ComponentLink10URL=https://datasheet.octopart.com/CRCW060310K0JNTA-Vishay-datasheet-10322335.pdf, ComponentLink11Description=https://datasheet.octopart.com/CRCW060310K0JNTA-Vishay-datasheet-8788789.pdf, ComponentLink11URL=https://datasheet.octopart.com/CRCW060310K0JNTA-Vishay-datasheet-8788789.pdf, ComponentLink12Description=https://datasheet.octopart.com/CRCW060310K0JNTA-Vishay-datasheet-8361388.pdf, ComponentLink12URL=https://datasheet.octopart.com/CRCW060310K0JNTA-Vishay-datasheet-8361388.pdf, ComponentLink13Description=https://datasheet.octopart.com/CRCW060310K0JNTA-Vishay-datasheet-5306405.pdf, ComponentLink13URL=https://datasheet.octopart.com/CRCW060310K0JNTA-Vishay-datasheet-5306405.pdf, ComponentLink14Description=https://datasheet.octopart.com/CRCW060310K0JNTA-Vishay-datasheet-546287.pdf, ComponentLink14URL=https://datasheet.octopart.com/CRCW060310K0JNTA-Vishay-datasheet-546287.pdf, ComponentLink15Description=https://datasheet.octopart.com/D-CRCW-Lead-%28Pb%29-Bearing-Thick-Film%2C-Rectangular-Chip-Resistors-Vishay-datasheet-family-72.pdf, ComponentLink15URL=https://datasheet.octopart.com/D-CRCW-Lead-%28Pb%29-Bearing-Thick-Film%2C-Rectangular-Chip-Resistors-Vishay-datasheet-family-72.pdf, ComponentLink16Description=https://datasheet.octopart.com:443/CRCW060310K0JNTA-Vishay-datasheet-62316123.pdf?src-supplier=Upverter, ComponentLink16URL=https://datasheet.octopart.com:443/CRCW060310K0JNTA-Vishay-datasheet-62316123.pdf?src-supplier=Upverter, ComponentLink17Description=https://datasheet.octopart.com:443/CRCW060310K0JNTA-Vishay-datasheet-78776609.pdf?src-supplier=Newark, ComponentLink17URL=https://datasheet.octopart.com:443/CRCW060310K0JNTA-Vishay-datasheet-78776609.pdf?src-supplier=Newark, ComponentLink18Description=https://datasheet.octopart.com:443/CRCW060310K0JNTA-Vishay-datasheet-159614008.pdf?src-supplier=Newark, ComponentLink18URL=https://datasheet.octopart.com:443/CRCW060310K0JNTA-Vishay-datasheet-159614008.pdf?src-supplier=Newark, ComponentLink19Description=https://datasheet.octopart.com:443/CRCW060310K0JNTA-Vishay-datasheet-62316122.pdf?src-supplier=Future+Electronics, ComponentLink19URL=https://datasheet.octopart.com:443/CRCW060310K0JNTA-Vishay-datasheet-62316122.pdf?src-supplier=Future+Electronics, ComponentLink20Description=http://sigma.octopart.com:80/rohs_statement/Vishay-company-15.pdf?src-supplier=Compliance+Statements, ComponentLink20URL=http://sigma.octopart.com:80/rohs_statement/Vishay-company-15.pdf?src-supplier=Compliance+Statements, Composition="Thick Film", Contact Plating="Lead, Tin", Depth=850µm, Export Control Classification Number (ECCN) Code=EAR99, Features="Automotive AEC-Q200", Harmonized Tariff Schedule (HTS) Code=8533.21.00.30, Height=450µm, Lead Free="Contains Lead", Length=1.55mm, Lifecycle Status=Production, Military Standard=Not, Mounting Technology="Surface Mount", Number of Terminals=2, Number of Terminations=2, Packaging="Tape & Reel (TR)", Power Dissipation=100mW, Power Rating=100mW, Pricing="1=0,144, 25=0,037, 50=0,035, 100=0,032 (USD)", Radiation Hardening=No, REACH SVHC=No, RoHS=Non-Compliant, Schedule B="8533210045, 8533210045|8533210045|8533210045|8533210045|8533210045", Stock=4232, Supplier=Avnet, Supplier 1=Avnet, Supplier Part Number 1=85AJ1017, Termination=SMD/SMT, Voltage Rating (DC)=75V, Weight=2.012816mg, Width=850µm, Working Voltage=75V
R8 R10 R12 R14 R16 R17 R18 R19: library part Resistor, "Res Thick Film 0603 220 Ohm 1% 0.1W(1/10W) ±100ppm/C Pad SMD T/R Automotive AEC-Q200", Case/Package=0603, Manufacturer=Vishay, Manufacturer Part Number=CRCW0603220RFKEC, Max Operating Temperature=155°C, Max Power Dissipation=100mW, Min Operating Temperature=-55°C, Ratings=AEC-Q200, Temperature Coefficient=100ppm/°C, Tolerance=1%, Voltage Rating=75V, Category="Chip SMD Resistors", China RoHS=Non-Compliant, ComponentLink1Description=https://datasheet.octopart.com:443/CRCW0603220RFKEC-Vishay-datasheet-175423584.pdf?src-supplier=IHS, ComponentLink1URL=https://datasheet.octopart.com:443/CRCW0603220RFKEC-Vishay-datasheet-175423584.pdf?src-supplier=IHS, ComponentLink2Description=https://datasheet.octopart.com:443/CRCW0603220RFKEC-Vishay-datasheet-62316122.pdf?src-supplier=Future+Electronics, ComponentLink2URL=https://datasheet.octopart.com:443/CRCW0603220RFKEC-Vishay-datasheet-62316122.pdf?src-supplier=Future+Electronics, ComponentLink3Description=http://sigma.octopart.com:80/rohs_statement/Vishay-company-15.pdf?src-supplier=Compliance+Statements, ComponentLink3URL=http://sigma.octopart.com:80/rohs_statement/Vishay-company-15.pdf?src-supplier=Compliance+Statements, Composition="Thick Film", Depth=850µm, Features="Automotive AEC-Q200", Height=450µm, Lead Free="Lead Free", Length=1.55mm, Lifecycle Status=Production, Military Standard=Not, Mounting Technology="Surface Mount", Number of Terminals=2, Number of Terminations=2, Packaging="Tape & Reel (TR)", Power Rating=100mW, Pricing="20000=0,0012, 80000=0,0012, 300000=0,0011, 800000=0,0011, 2000000=0,0011 (USD)", REACH SVHC=Yes, RoHS=Compliant, Stock=20000, Supplier="Future Electronics", Supplier 1="Future Electronics", Supplier Part Number=CRCW0603220RFKEC, Supplier Part Number 1=CRCW0603220RFKEC, Width=850µm, Working Voltage=75V
SW1 SW2: library part CMP-03913-99472334-3, "Tactile Switch, 0.05A, 12Vdc, 260Gf, Smd Rohs Compliant: Yes", Current Rating=50mA, Insulation Resistance=100MΩ, Max Operating Temperature=85°C, Min Operating Temperature=-40°C, Voltage Rating=12V, Contact Plating=Silver, Height=4.3mm, Packaging="Tape and Reel", RoHS=Compliant
U1: library part CMP-04917-000001-1, "IC REG LIN 3.3V 500MA SOT223-4", Dropout Voltage=2V, Manufacturer="Texas Instruments", Max Junction Temp=+125°C, Max Supply Voltage=25V, Min Supply Voltage=5.3V, Output Current=500mA, Output Voltage=3.3V, Package=DCY0004A, Temperature="0°C to +125°C", Temperature Range Low=0°C, Accuracy Percentage=3%, Automotive=No, Category=IC, ComponentLink2Description=Datasheet, ComponentLink2URL=http://www.ti.com/lit/ds/symlink/ua78m.pdf, Device Class L1="Integrated Circuits (ICs)", Device Class L2="Power Management ICs", Device Class L3="Voltage Regulators - Linear", Digikey Description="IC REG LIN 3.3V 500MA SOT223-4", Height=1.8mm, Lead Free=Yes, Manufacturer Part Number=UA78M33CDCY, Mouser Description="Standard Regulator Position 3.3 Volt 0.5A 4-Pin(3+Tab) SOT-223", Number Of Outputs=1, Octopart=https://octopart.com/ua78m33cdcy-texas+instruments-1010398, Output Type=Fixed, RoHS=TRUE, Standoff Height=0.02mm, Temperature Range High=+125°C
U2: library part CMP-0304-00174-1, "ARM Cortex-M0 32-bit MCU, 128 KB Flash, 16 KB Internal RAM, 37 I/Os, 48-Pin UFQFPN, -40 to 85 degC, Tape and Reel", I/Os (High Current)=37, Operating Frequency(F) (Processor speed) (MHz)=48, Package Description="48-Pin Ultra Thin Fine Pitch Quad Flat No-Lead, 7 x 7 x 0.6 mm Body, 0.5 mm Pitch, Exposed Pad", Package Reference=UFQFPN48, Supply Voltage(Vcc) min (V)=2, ComponentLink1Description="Manufacturer URL", ComponentLink1URL=http://www.st.com/, ComponentLink2Description=Datasheet, ComponentLink2URL=http://www.st.com/st-web-ui/static/active/en/resource/technical/document/datasheet/DM00090510.pdf, Core="ARM Cortex-M0", D/A Converter=1, DatasheetVersion="Rev. 5", FLASH Size (Prog) (kB)=128, Internal RAM Size (kB)=16, Mounting Technology="Surface Mount", Packing="Tape and Reel"
VT1 VT2 VT3 VT4: library part CMP-32901-000110-1, "MOSFET N-CH 30V 2.7A SOT-23-3", Continuous Drain Current=2.7A, Drain To Source Breakdown Voltage=30V, Drain To Source Resistance=123mΩ, Gate To Source Voltage=20V, Input Capacitace At Vds="110pF @ 15V", Manufacturer=Infineon, Max Forward Diode Voltage=1V, Max Junction Temp=+150°C, Package=Micro3, Power Dissipation=1.3W, Pulse Drain Current=11A, Temperature="-55°C to +150°C", Temperature Range Low=-55°C, Automotive=No, Category=Trans, ComponentLink2Description=Datasheet, ComponentLink2URL=https://www.infineon.com/dgdl/irlml2030pbf.pdf?fileId=5546d462533600a401535664aef525ec, Depletion Mode=False, Device Class L1="Discrete Semiconductors", Device Class L2=Transistors, Device Class L3=MOSFETs, Digikey Description="MOSFET N-CH 30V 2.7A SOT-23-3", Drain To Source Voltage=30V, Footprint Url=http://www.irf.com/package/outline/po_micro3.pdf, Gate Charge At Vgs="1nC @ 4.5V", Height=1.12mm, Ipc Land Pattern Name=SOT95P237X100-3, Lead Free=Yes, Manufacturer Part Number=IRLML2030TRPBF, Number Of Channels=1, Number Of N Channels=1, Octopart=https://octopart.com/irlml2030trpbf-infineon-65874966, Reverse Recovery Charge=0.3nC, Reverse Recovery Time=9ns, RoHS=TRUE, Rthja Max=100°C/W, Standoff Height=0.01mm, Temperature Range High=+150°C, Threshold Vgs Max=2.3V, Threshold Vgs Min=1.3V, Turn Off Delay Time=4.5ns, Turn On Delay Time=4.1ns

## Via types
v1: diameter 1, hole 0.5, L1(Signal) to L4(Signal), 34 vias
v2: diameter 0.5, hole 0.2, L1(Signal) to L4(Signal), 25 vias
v3: diameter 0.5, hole 0.25, L1(Signal) to L2(Power), 12 vias
v4: diameter 1.27, hole 0.711, L1(Signal) to L4(Signal), 1 vias

## Nets (pads, with @x,y where several pads share a name; then routed paths per layer and width w, separated by ;. In a path a pad name is that pad's centre, name@x,y a point inside that pad or via, vN(x,y) a via of type N, cw(c..) or ccw(c..) an arc to the next point about the centre after c; other vN are vias at no path point)
+3.3V: C2.1 C4.1 C5.1 C6.1 C7.1 C8.1 C9.1 C11.1 C12.1 P1.1 U1.3 U2.1 U2.9 U2.24 U2.36 U2.48 | length 40.9
  L1(Signal) w0.254: C4.1 6.951,22.323 C7.1 ; v1(7,20) C7.1 ; C9.1 7.323,37.051 C8.1 7.323,32.748 9.5,30.571 U2.36 ; U2.48 8.802,24.15 8.8,24.148 8.8,23.649 8.949,23.5 U2.1 9.5,23.229 8.771,22.5 7.226,22.5 C7.1 ; U2.9 13.5,22 14.5,21 17.277,21 C11.1 C12.1 20,20.654 20.379,20.275 22.023,20.275 22.298,20 v1(22.5,20) ; U2.24 16.85,29.65 17.274,29.226 C6.1 C5.1 v3(21,31)
  L1(Signal) w0.35: P1.1 4.34,36.66 6.4,34.6 C8.1
  other v3: 19,31 20,31 22,31 23,31 24,31 19,32 20,32 21,32 22,32 23,32 24,32
+24V: C1.2 D1.2 J1.P K1.1 K1.2 U1.1 | length 43.9
  L1(Signal) w0.8: C1.2 19.875,39 20.05,38.825 21.575,38.825 U1.1
  L1(Signal) w1.5: U1.1@21.76,39 21.76,40.76 24.65,43.65 K1.1 K1.2 39.04,52.31 41.5,49.85 D1.2 41.5,49.875 41.625,50 J1.P
GND: C1.1 C2.2 C3.2 C4.2 C5.2 C6.2 C7.2 C8.2 C9.2 C10.2 C11.2 C12.2 J1.N J2.N P1.5 R3.2 R6.1 R9.1 R11.2 R15.1 SW1.B1 SW1.B2 SW2.B1 SW2.B2 U1.2 U1.4 U2.8 U2.23 U2.35 U2.47 U2.49 VT1.2 VT2.2 VT3.2 VT4.2 | length 109.9
  L1(Signal) w0.254: C4.2 6.951,23.677 7.2,23.926 7.711,23.926 8.434,24.648 8.848,24.648 U2.47 10,24.65 v2(10.05,24.7) ; v4(6.5,11.5) C3.2 ; C9.2 8.726,34.649 C8.2 ; v2(10.05,29.1) 10,29.15 U2.35 10,31.33 8.677,32.653 C8.2 ; v1(10.448,34.592) 10.44,34.6 C8.2 ; v2(13.35,24.7) 13,24.35 U2.8 13,21 14.5,19.5 17.223,19.5 C11.2 C12.2 20,18.16 19.572,17.732 19.572,17.072 SW1.B2 ; v2(14.45,29.1) 14.5,29.15 U2.23 16.35,29.15 17.789,27.711 18.437,27.711 C6.2 C5.2 ; C2.2 16.774,34.726 v1(16,35.5) 15,36.5 v1(15,39) C1.1 ; SW1.B1 v1(19,5) ; SW1.B2@19,16.4 19.773,15.627 19.873,15.627 21.054,14.446 C10.2 ; R3.2 34.04,39.265 35.805,37.5 v1(38.5,37.5) ; SW2.B1 v1(37,9) SW2.B2 ; VT2.2 44.5,18.565 R6.1 44.79,16.36 45.14,16.36 45.5,16 45.5,12.702 45,12.202 v1(45,12) ; VT3.2 55.5,16.065 R9.1 ; R9.1@55.55,14.15 56.098,13.602 56.11,13.602 57,12.712 v1(57,10.5) ; VT4.2 60.5,16.065 R15.1 60.55,14.125 61.098,13.577 61.11,13.577 62,12.687 v1(62,10.5)
  L1(Signal) w0.35: P1.5 4,25.5 R11.2
  L1(Signal) w0.8: VT1.2 38.43,37.624 38.5,37.554 v1(38.5,37.5)
  L1(Signal) w1.2: U1.2 v1(29.5,36.5)
  L4(Signal) w0.254: v1@10.44,34.6 v1(10.448,34.592)
  other v2: 11.15,24.7 12.25,24.7 14.45,24.7 10.05,25.8 11.15,25.8 12.25,25.8 13.35,25.8 14.45,25.8 10.05,26.9 11.15,26.9 12.25,26.9 13.35,26.9 14.45,26.9 10.05,28 11.15,28 12.25,28 13.35,28 14.45,28 11.15,29.1 12.25,29.1 13.35,29.1
L: R19.1 U2.17 | length 14.9
  L1(Signal) w0.254: U2.17 16.554,26.15 16.766,26.362 18.581,26.362 18.781,26.562 22.062,26.562 24.475,28.975 R19.1
NetC3_1: C3.1 R2.2 SW1.A1 SW1.A2 | length 23.2
  L1(Signal) w0.254: C3.1 6.5,15.932 6.879,15.552 7.045,15.552 8.097,14.5 8.85,14.5 R2.2 9.298,14.648 10.148,14.648 12,16.5 SW1.A2 SW1.A1
NetC10_1: C10.1 R4.2 SW2.A1 SW2.A2 | length 21.7
  L1(Signal) w0.254: C10.1 26.85,16 R4.2 29.65,16.15 30,16.5 SW2.A2 SW2.A1
NetD1_1: D1.1 K1.4 VT1.3 | length 8.1
  L1(Signal) w0.8: D1.1 38.335,45.35 37.675,44.69 K1.4 37.479,44.561 VT1.3 ; VT1.3 VT1.3
NetD2_A: D2.A R8.2 | length 19
  L1(Signal) w0.254: R8.2@30.602,24 31.5,24 38.5,31 43.413,31 45.212,32.798 45.638,32.798 D2.A
NetD2_B: D2.B R10.2 | length 22.5
  L1(Signal) w0.254: R10.2 31.5,21.5 39.5,29.5 44.803,29.5 46.829,31.526 46.906,31.526 D2.B
NetD2_C: D2.C R12.2 | length 5.5
  L1(Signal) w0.254: D2.C 47,21.68 47.82,21.68 49,20.5 R12.2
NetD2_D: D2.D R14.2 | length 5.4
  L1(Signal) w0.254: D2.D 49.72,21.5 50.5,21.5 51,21 R14.2@51,19.007
NetD2_D1: D2.D1 VT2.3 | length 3.8
  L1(Signal) w0.254: D2.D1 42.1,21.5 42.385,21.5 43.141,20.744 43.226,20.744 43.5,20.47 VT2.3
NetD2_D2: D2.D2 VT3.3 | length 6.4
  L1(Signal) w0.254: D2.D2 52.674,21.086 52.674,19.796 54.5,17.97 VT3.3
NetD2_D3: D2.D3 VT4.3 | length 6.6
  L1(Signal) w0.254: D2.D3 56,21 58.867,18.133 59.252,18.133 VT4.3
NetD2_E: D2.E R16.2 | length 6
  L1(Signal) w0.254: D2.E 45.14,21 46.5,21 47,20.5 R16.2
NetD2_F: D2.F R17.2 | length 10.3
  L1(Signal) w0.254: R17.2 30.65,26.525 30.948,26.823 30.998,26.823 37.175,33 D2.F
NetD2_G: D2.G R18.2 | length 27.3
  L1(Signal) w0.254: R18.2 30.65,31.525 30.948,31.823 30.998,31.823 33.675,34.5 54.5,34.5 D2.G
NetD2_L: D2.L R19.2 | length 12.6
  L1(Signal) w0.254: R19.2 30.65,29.025 30.948,29.323 30.998,29.323 35.675,34 39.76,34 D2.L
NetJ2_P: J2.P K1.3 | length 7.7
  L1(Signal) w2: J2.P 21.8,45 K1.3
NetP1_4: P1.4 R2.1 U2.7 | length 23.9
  L1(Signal) w0.254: R2.1 v1(9,17.5) 9,18.5 10,19.5 12.5,22 U2.7@12.5,23.227
  L4(Signal) w0.254: P1.4 3.235,28.805 3.235,27.859 5.557,25.536 5.557,19.443 7.5,17.5 v1(9,17.5)
NetR1_2: R1.2 R3.1 VT1.1 | length 5.6
  L1(Signal) w0.254: R1.2 R3.1 34.288,40.267 34.761,40.267 35.748,39.28 VT1.1
NetR4_1: R4.1 U2.2 | length 25.1
  L1(Signal) w0.254: v1(9.5,21) 9.5,21.202 10,21.702 U2.2 ; v1(24,12) 24.1,12 26.95,14.85 R4.1
  L4(Signal) w0.254: v1(9.5,21) 18.5,12 v1(24,12)
NetR5_1: R5.1 R6.2 VT2.1 | length 4.5
  L1(Signal) w0.254: VT2.1 42.5,18.565 R5.1 42.55,16.65 43.098,16.102 43.398,16.102 43.852,15.648 44.202,15.648 R6.2
NetR5_2: R5.2 U2.31 | length 43.3
  L1(Signal) w0.254: U2.31 U2.31 12.002,30.716 12.048,30.762 12.313,31.027 15.027,31.027 15.381,31.381 15.881,31.381 v1(16,31.5) ; v1(42.5,12) R5.2
  L4(Signal) w0.254: v1(16,31.5) 17.5,31.5 23.5,25.5 30,25.5 42.381,13.119 42.381,12.119 v1(42.5,12)
NetR7_1: R7.1 R9.2 VT3.1 | length 4.5
  L1(Signal) w0.254: VT3.1 53.5,16.065 R7.1 53.55,14.15 54.098,13.602 54.19,13.602 54.793,12.999 55.351,12.999 R9.2
NetR7_2: R7.2 U2.32 | length 55.6
  L1(Signal) w0.254: U2.32 11.5,30.856 11.594,30.95 12.125,31.481 13.043,31.481 14.419,32.857 14.857,32.857 v1(15,33) ; v1(53.5,10.5) R7.2
  L4(Signal) w0.254: v1(15,33) 17,33 24,26 30.142,26 43.096,13.046 51.854,13.046 53.5,11.4 v1(53.5,10.5)
NetR11_1: R11.1 U2.44 | length 2
  L1(Signal) w0.254: R11.1 7.171,25.521 7.807,25.521 8.434,26.148 8.848,26.148 U2.44
NetR13_1: R13.1 R15.2 VT4.1 | length 5
  L1(Signal) w0.254: VT4.1 58.5,16.065 R13.1 59.351,14.125 59.5,13.976 59.5,13.125 59.793,12.832 60.493,12.832 R15.2
NetR13_2: R13.2 U2.33 | length 61.9
  L1(Signal) w0.254: U2.33 11.002,30.302 11.002,31.002 v1(14.5,34.5) ; v1(58.5,10.5) R13.2
  L4(Signal) w0.254: v1(14.5,34.5) 16.5,34.5 24.5,26.5 30.284,26.5 43.284,13.5 55.5,13.5 v1(58.5,10.5)
RELAY_CONTROL: R1.1 U2.38 | length 32.1
  L1(Signal) w0.254: v1(6.5,28.5) 7.15,29.15 U2.38 ; v1(29,39) 30,39 30.265,39.265 R1.1
  L4(Signal) w0.254: v1(6.5,28.5) 9.673,31.673 10.343,31.673 16.67,38 25,38 26.138,39.138 28.862,39.138 v1(29,39)
SEG_A: R8.1 U2.10 | length 17.7
  L1(Signal) w0.254: U2.10 14,22.5 14.5,22 v1(22,22) ; v1(27.5,24) R8.1
  L4(Signal) w0.254: v1(22,22) 22.119,22.119 22.119,22.619 23.5,24 v1(27.5,24)
SEG_B: R10.1 U2.11 | length 16.3
  L1(Signal) w0.254: U2.11 14.502,23.498 14.502,23.084 15.086,22.5 19.5,22.5 20,23 22.5,23 24,21.5 R10.1
SEG_C: R12.1 U2.12 | length 49.7
  L1(Signal) w0.254: U2.12 15,23.229 15.229,23 19,23 19.357,23.357 19.357,23.857 v1(19.5,24) ; v1(49,11.5) R12.1
  L4(Signal) w0.254: v1(19.5,24) 19.6,23.9 19.6,20 29.1,10.5 48,10.5 v1(49,11.5)
SEG_D: R14.1 U2.13 | length 50.3
  L1(Signal) w0.254: U2.13 16.992,24.15 16.999,24.143 17.357,24.143 v1(17.5,24) ; v1(51,11.5) R14.1
  L4(Signal) w0.254: v1(17.5,24) 17.5,21.217 28.671,10.046 50.448,10.046 50.851,10.449 51,10.598 v1(51,11.5)
SEG_E: R16.1 U2.14 | length 47.2
  L1(Signal) w0.254: U2.14 16.98,24.65 17.33,25 20.5,25 v1(21.5,24) ; v1(47,11.5) R16.1
  L4(Signal) w0.254: v1(21.5,24) 21.5,22.67 21,22.17 21,19.5 29.5,11 46.478,11 46.978,11.5 v1(47,11.5)
SEG_F: R17.1 U2.15 | length 14.2
  L1(Signal) w0.254: U2.15 16.838,25.15 17.142,25.454 18.957,25.454 19.157,25.654 23.231,25.654 24.052,26.475 R17.1
SEG_G: R18.1 U2.16 | length 16.7
  L1(Signal) w0.254: U2.16 16.696,25.65 16.954,25.908 18.769,25.908 18.969,26.108 22.608,26.108 24.053,27.553 24.488,27.553 v1(24.631,27.695) ; v1(26,30) 27.475,31.475 R18.1
  L4(Signal) w0.254: v1(24.631,27.695) 24.695,27.695 26,29 v1(26,30)
SWCLK: P1.3 U2.37 | length 6.6
  L1(Signal) w0.254: P1.3 4.93,29.65 U2.37
SWDIO: P1.2 U2.34 | length 10.1
  L1(Signal) w0.254: v1(10,32.5) 10,32.298 10.5,31.798 U2.34
  L4(Signal) w0.254: P1.2 4.62,32.5 v1(10,32.5)
pads on no net: D2.DP J1.S1 J1.S2 J2.S1 J2.S2 U2.3 U2.4 U2.5 U2.6 U2.18 U2.19 U2.20 U2.21 U2.22 U2.25 U2.26 U2.27 U2.28 U2.29 U2.30 U2.39 U2.40 U2.41 U2.42 U2.43 U2.45 U2.46

## Polygon pours and split planes (outlines as drawn)
+3.3V on L1(Signal) "+3.3V_L01_P000" (solid, remove dead copper, pour order 0): 18,35.5 18,30.5 25.5,30.5 25.5,35.5
+3.3V on L2(Power) (split plane): 62.99,0.51 0.51,0.51 0.51,54.99 62.99,54.99
GND on L3(GND) (split plane): 62.99,0.51 0.51,0.51 0.51,54.99 62.99,54.99

## Silkscreen, mask and mechanical layers (free items; w line width, h text height)
Top Overlay:
  text "+24V OUT" at 3.254,38.784 h1.52
  text "+24V IN" at 51.254,38.254 h1.52
  text "NRST" at 4.254,5.754 h1.52
  text "CONTROL BUTTON" at 41,2 h1.52
Mechanical 1:
  lines w0.254: 0,0 19,0 63.5,0 63.5,13.875 63.5,41.625 63.5,55.5 0,55.5 0,0